# Altium PCB mdap.PcbDoc (part 1 of 2)
Units mil, origin at the board's own origin, x right, y up, seen from the top; angles counter-clockwise.
Board outline 1970 x 1970 mil, 4 copper layers (Top Layer, Internal Plane 1, Signal Layer 1, Bottom Layer), stack 45.004 mil thick; 153 components, 124 nets, 474 pads, 214 vias.
Unrouted connection lines stored in the file: 3.
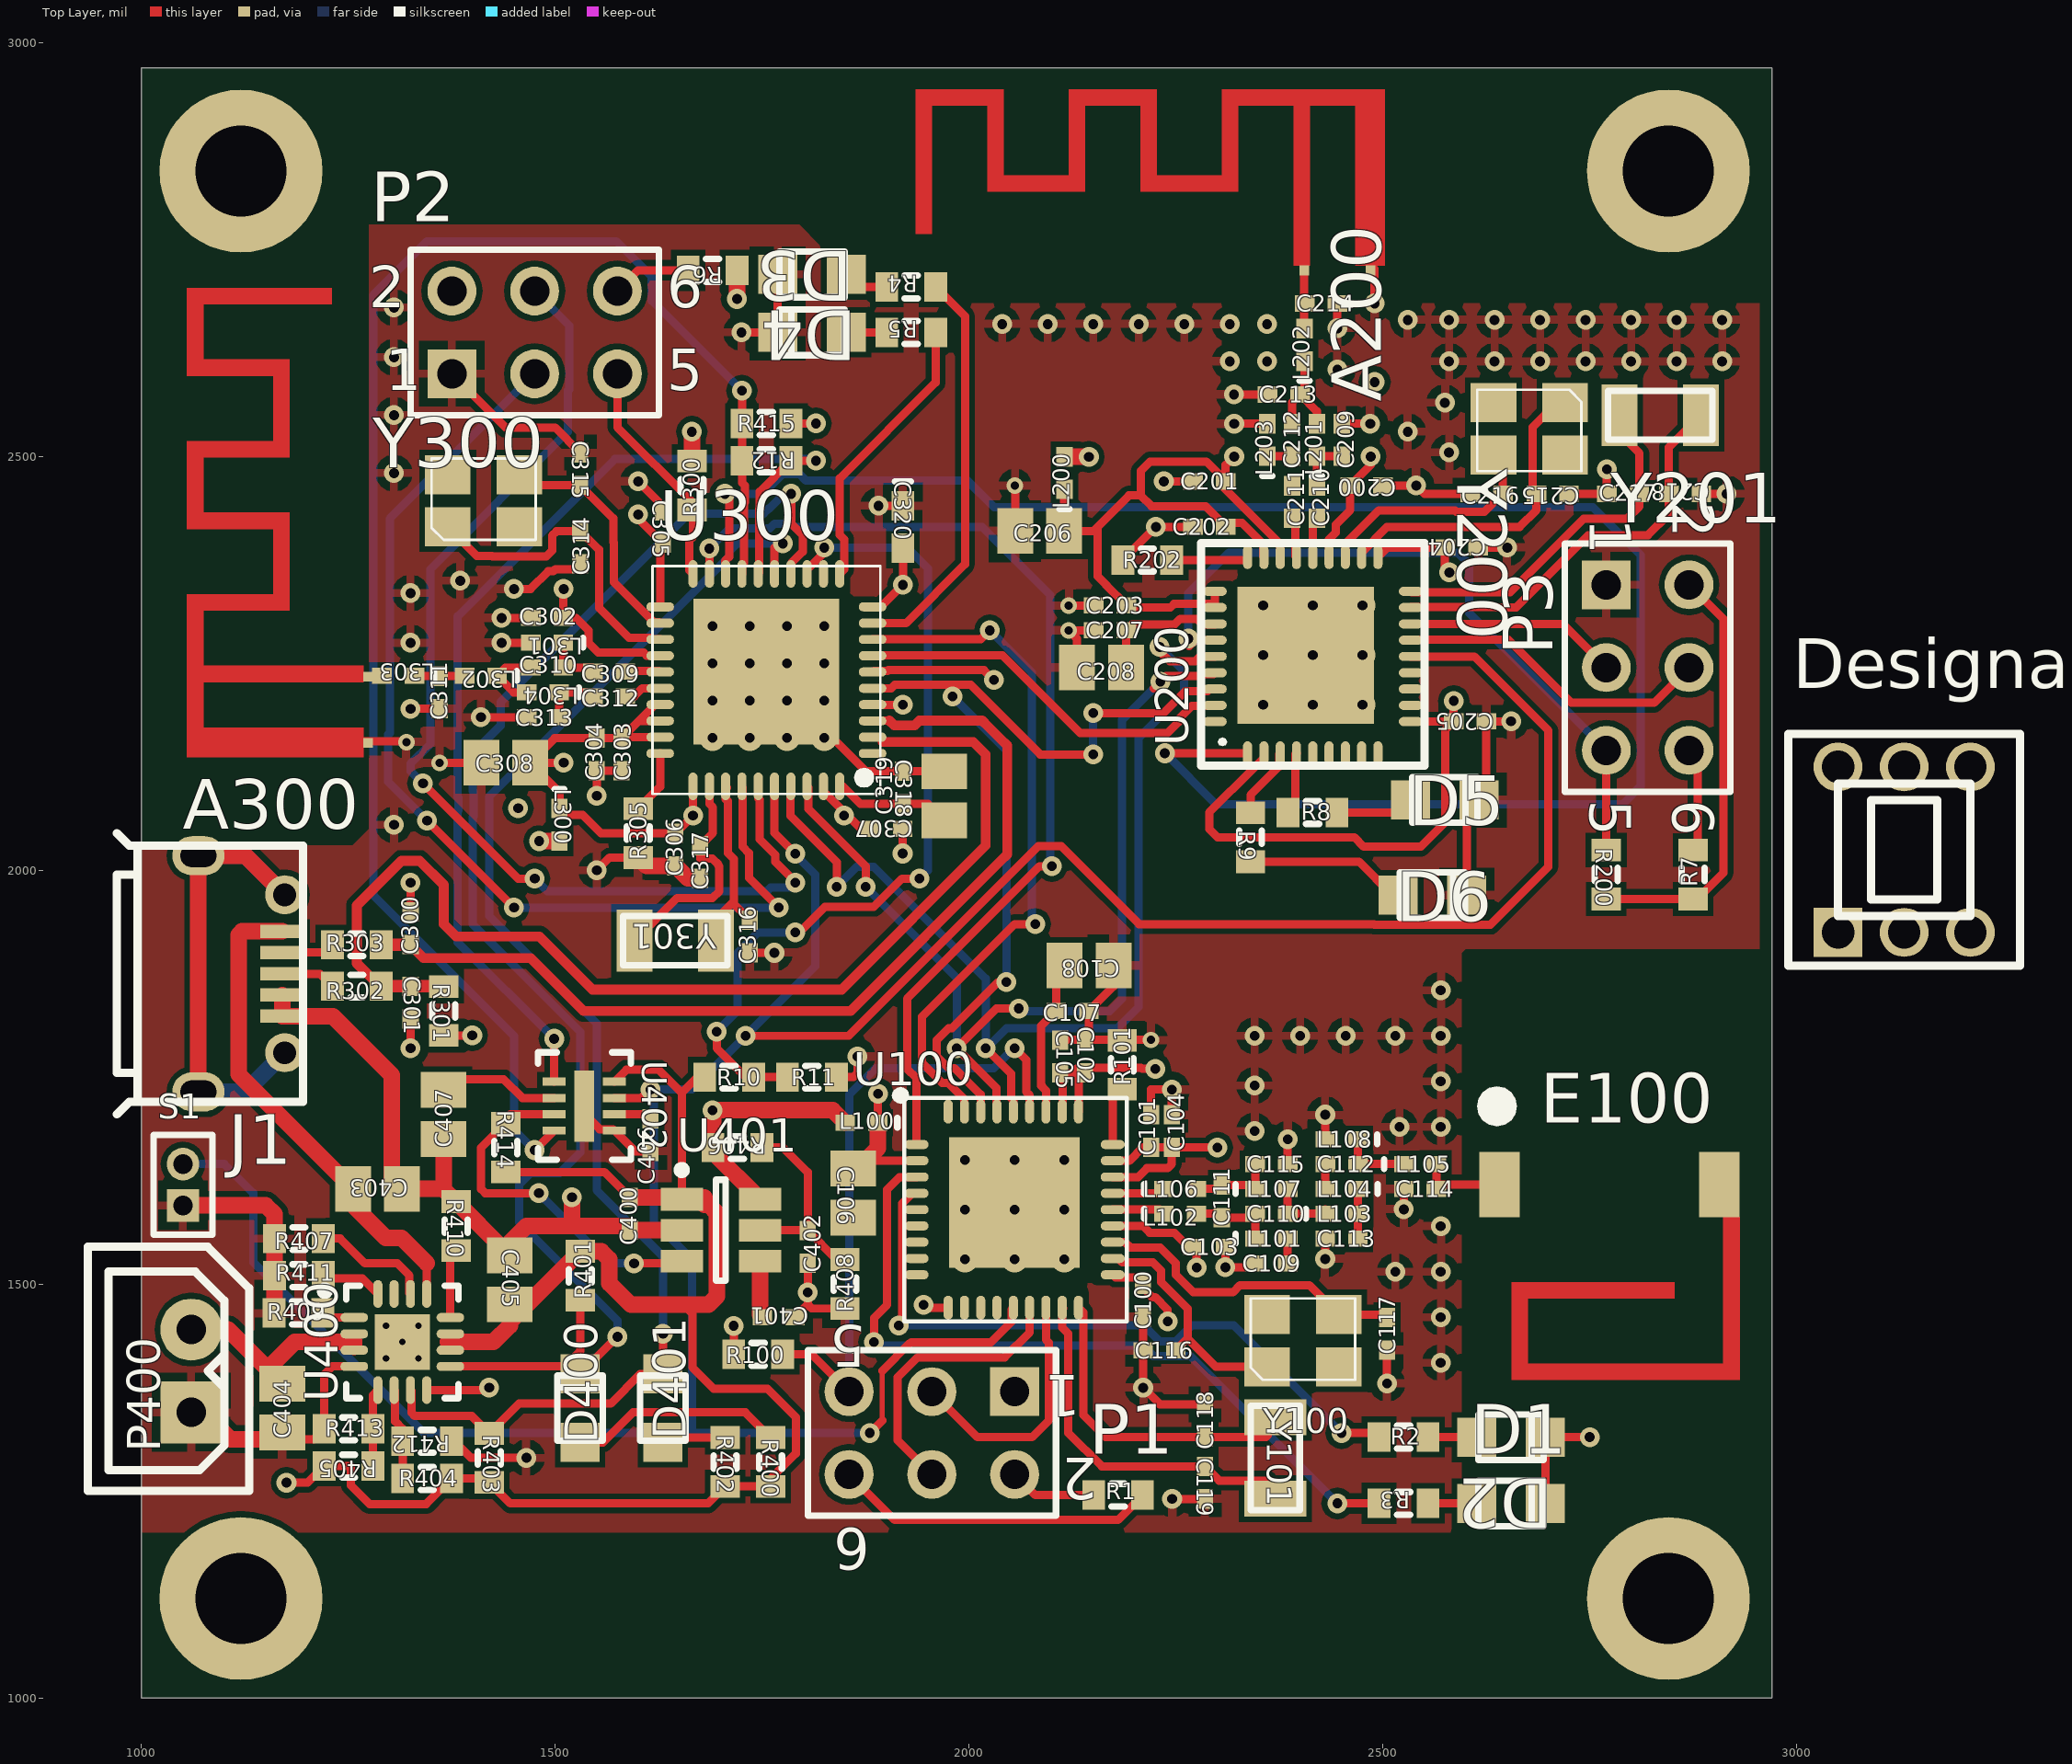
[diagram p0: Top Layer view]
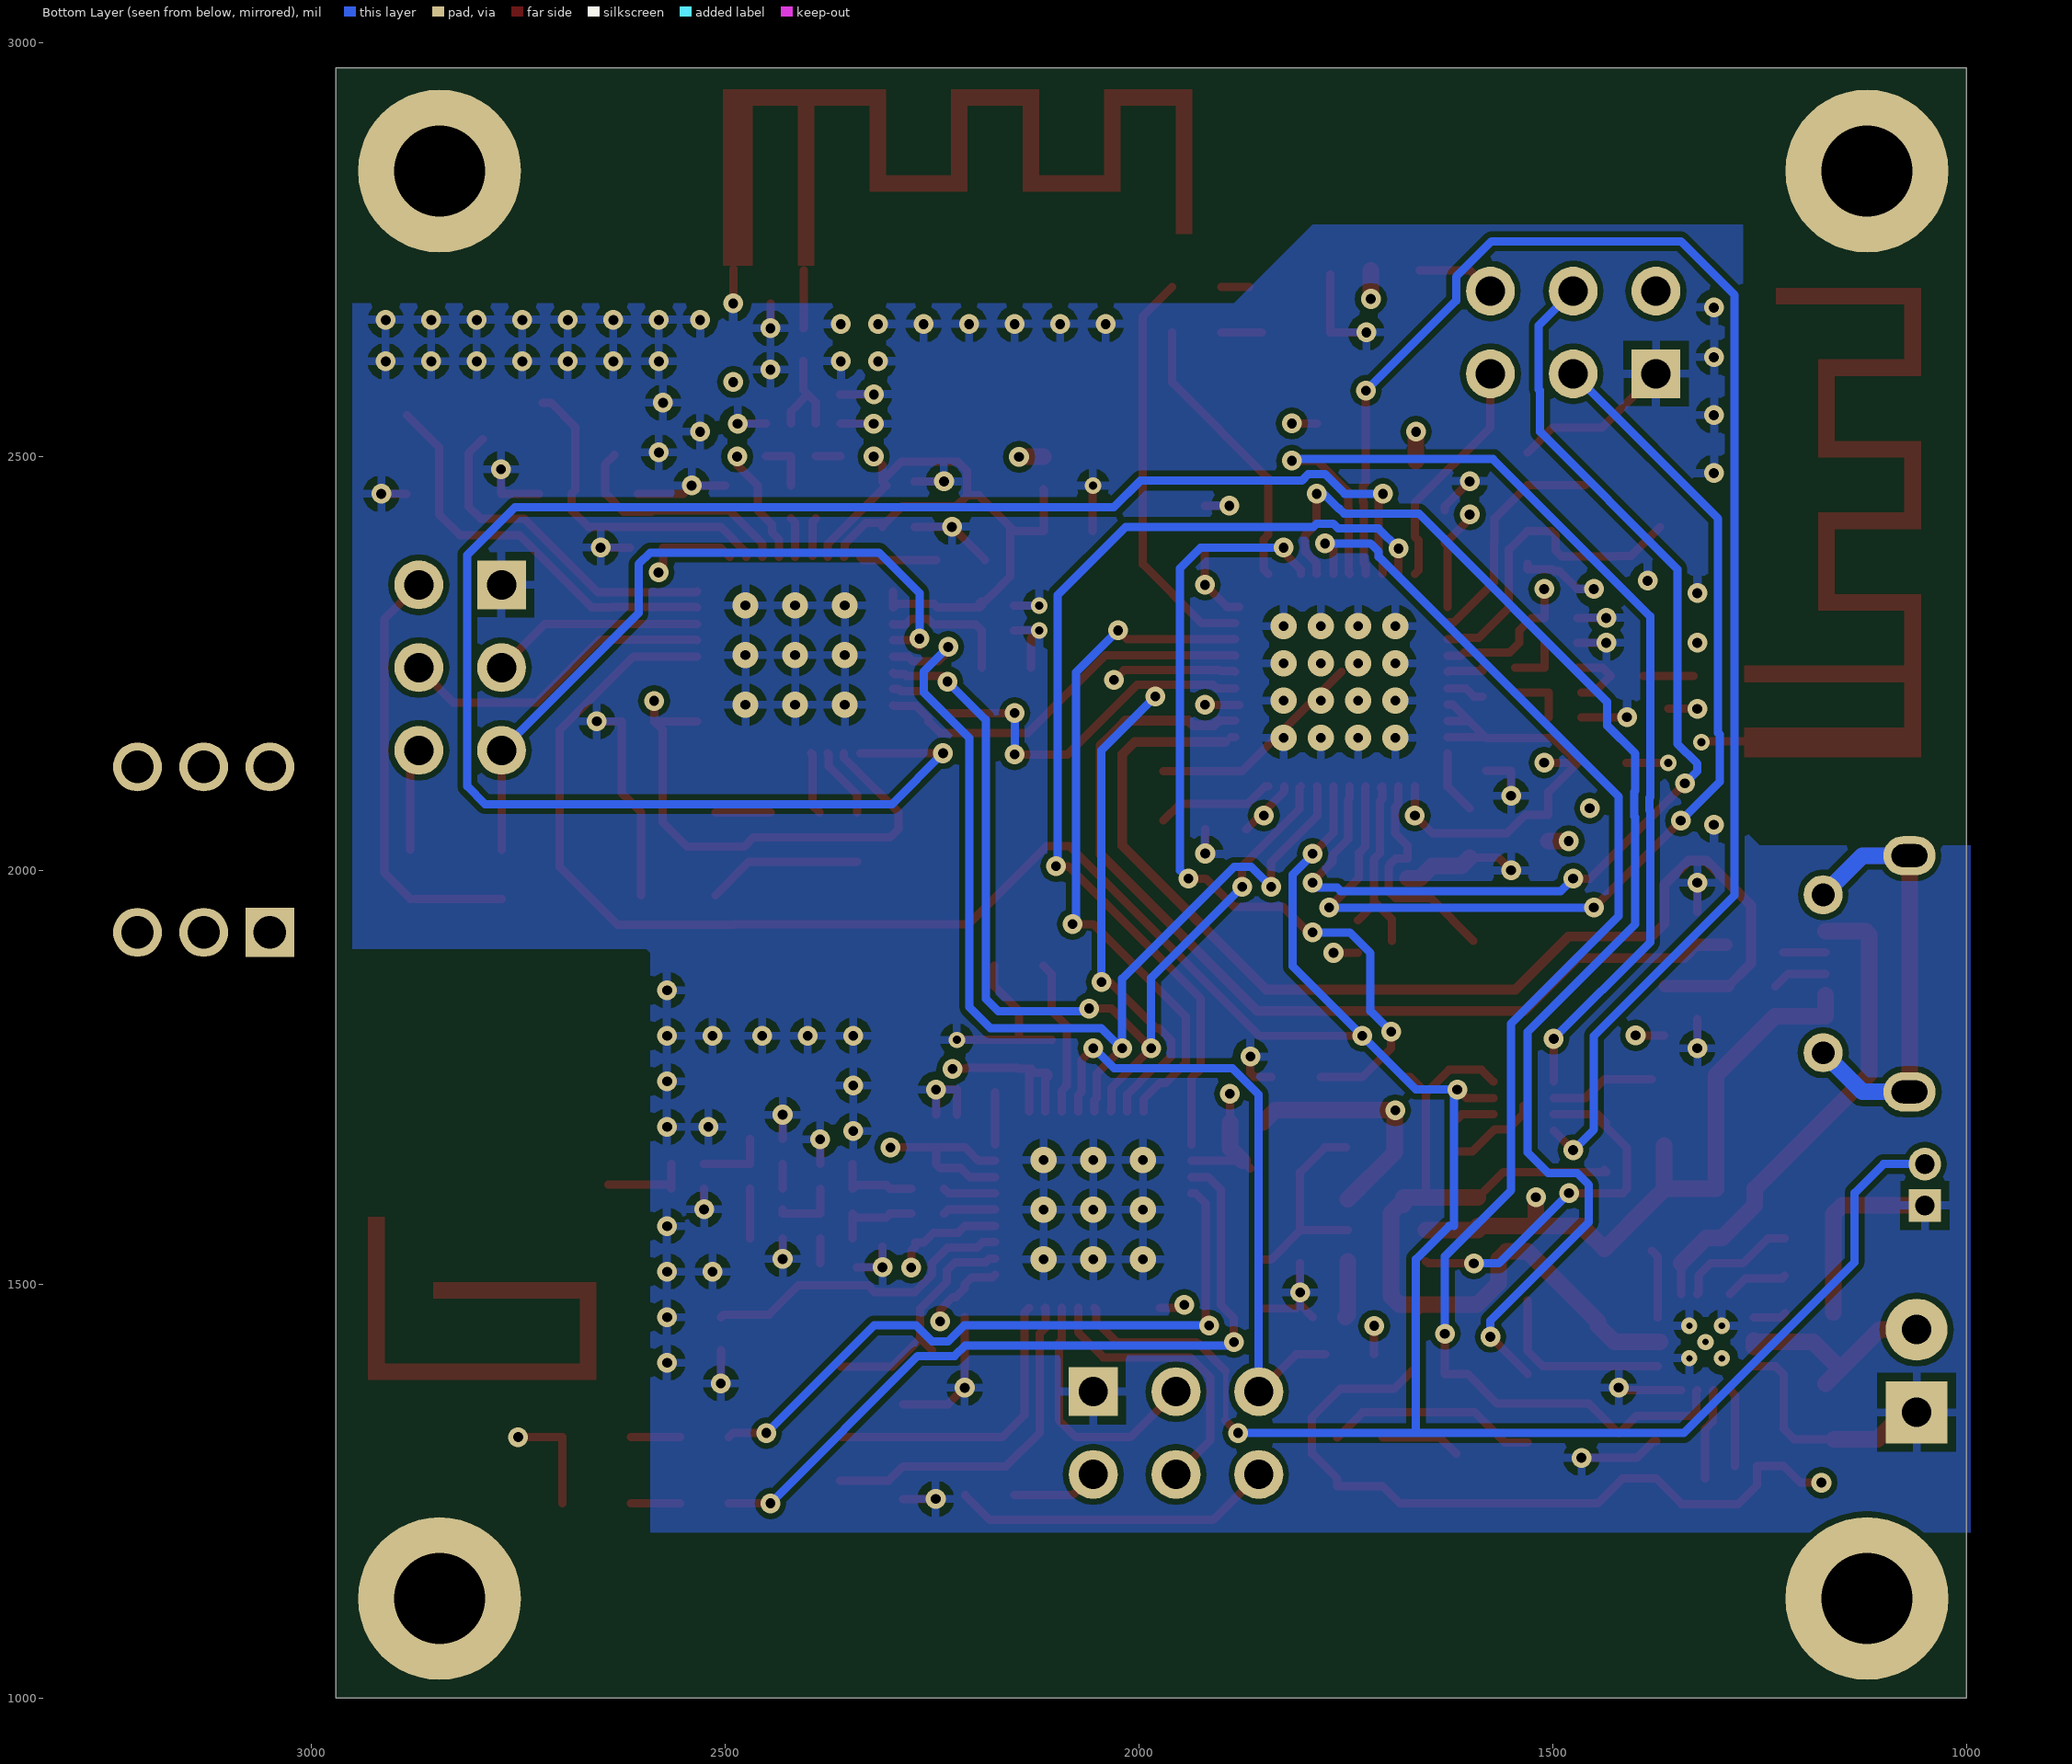
[diagram p1: Bottom Layer view, seen from below]
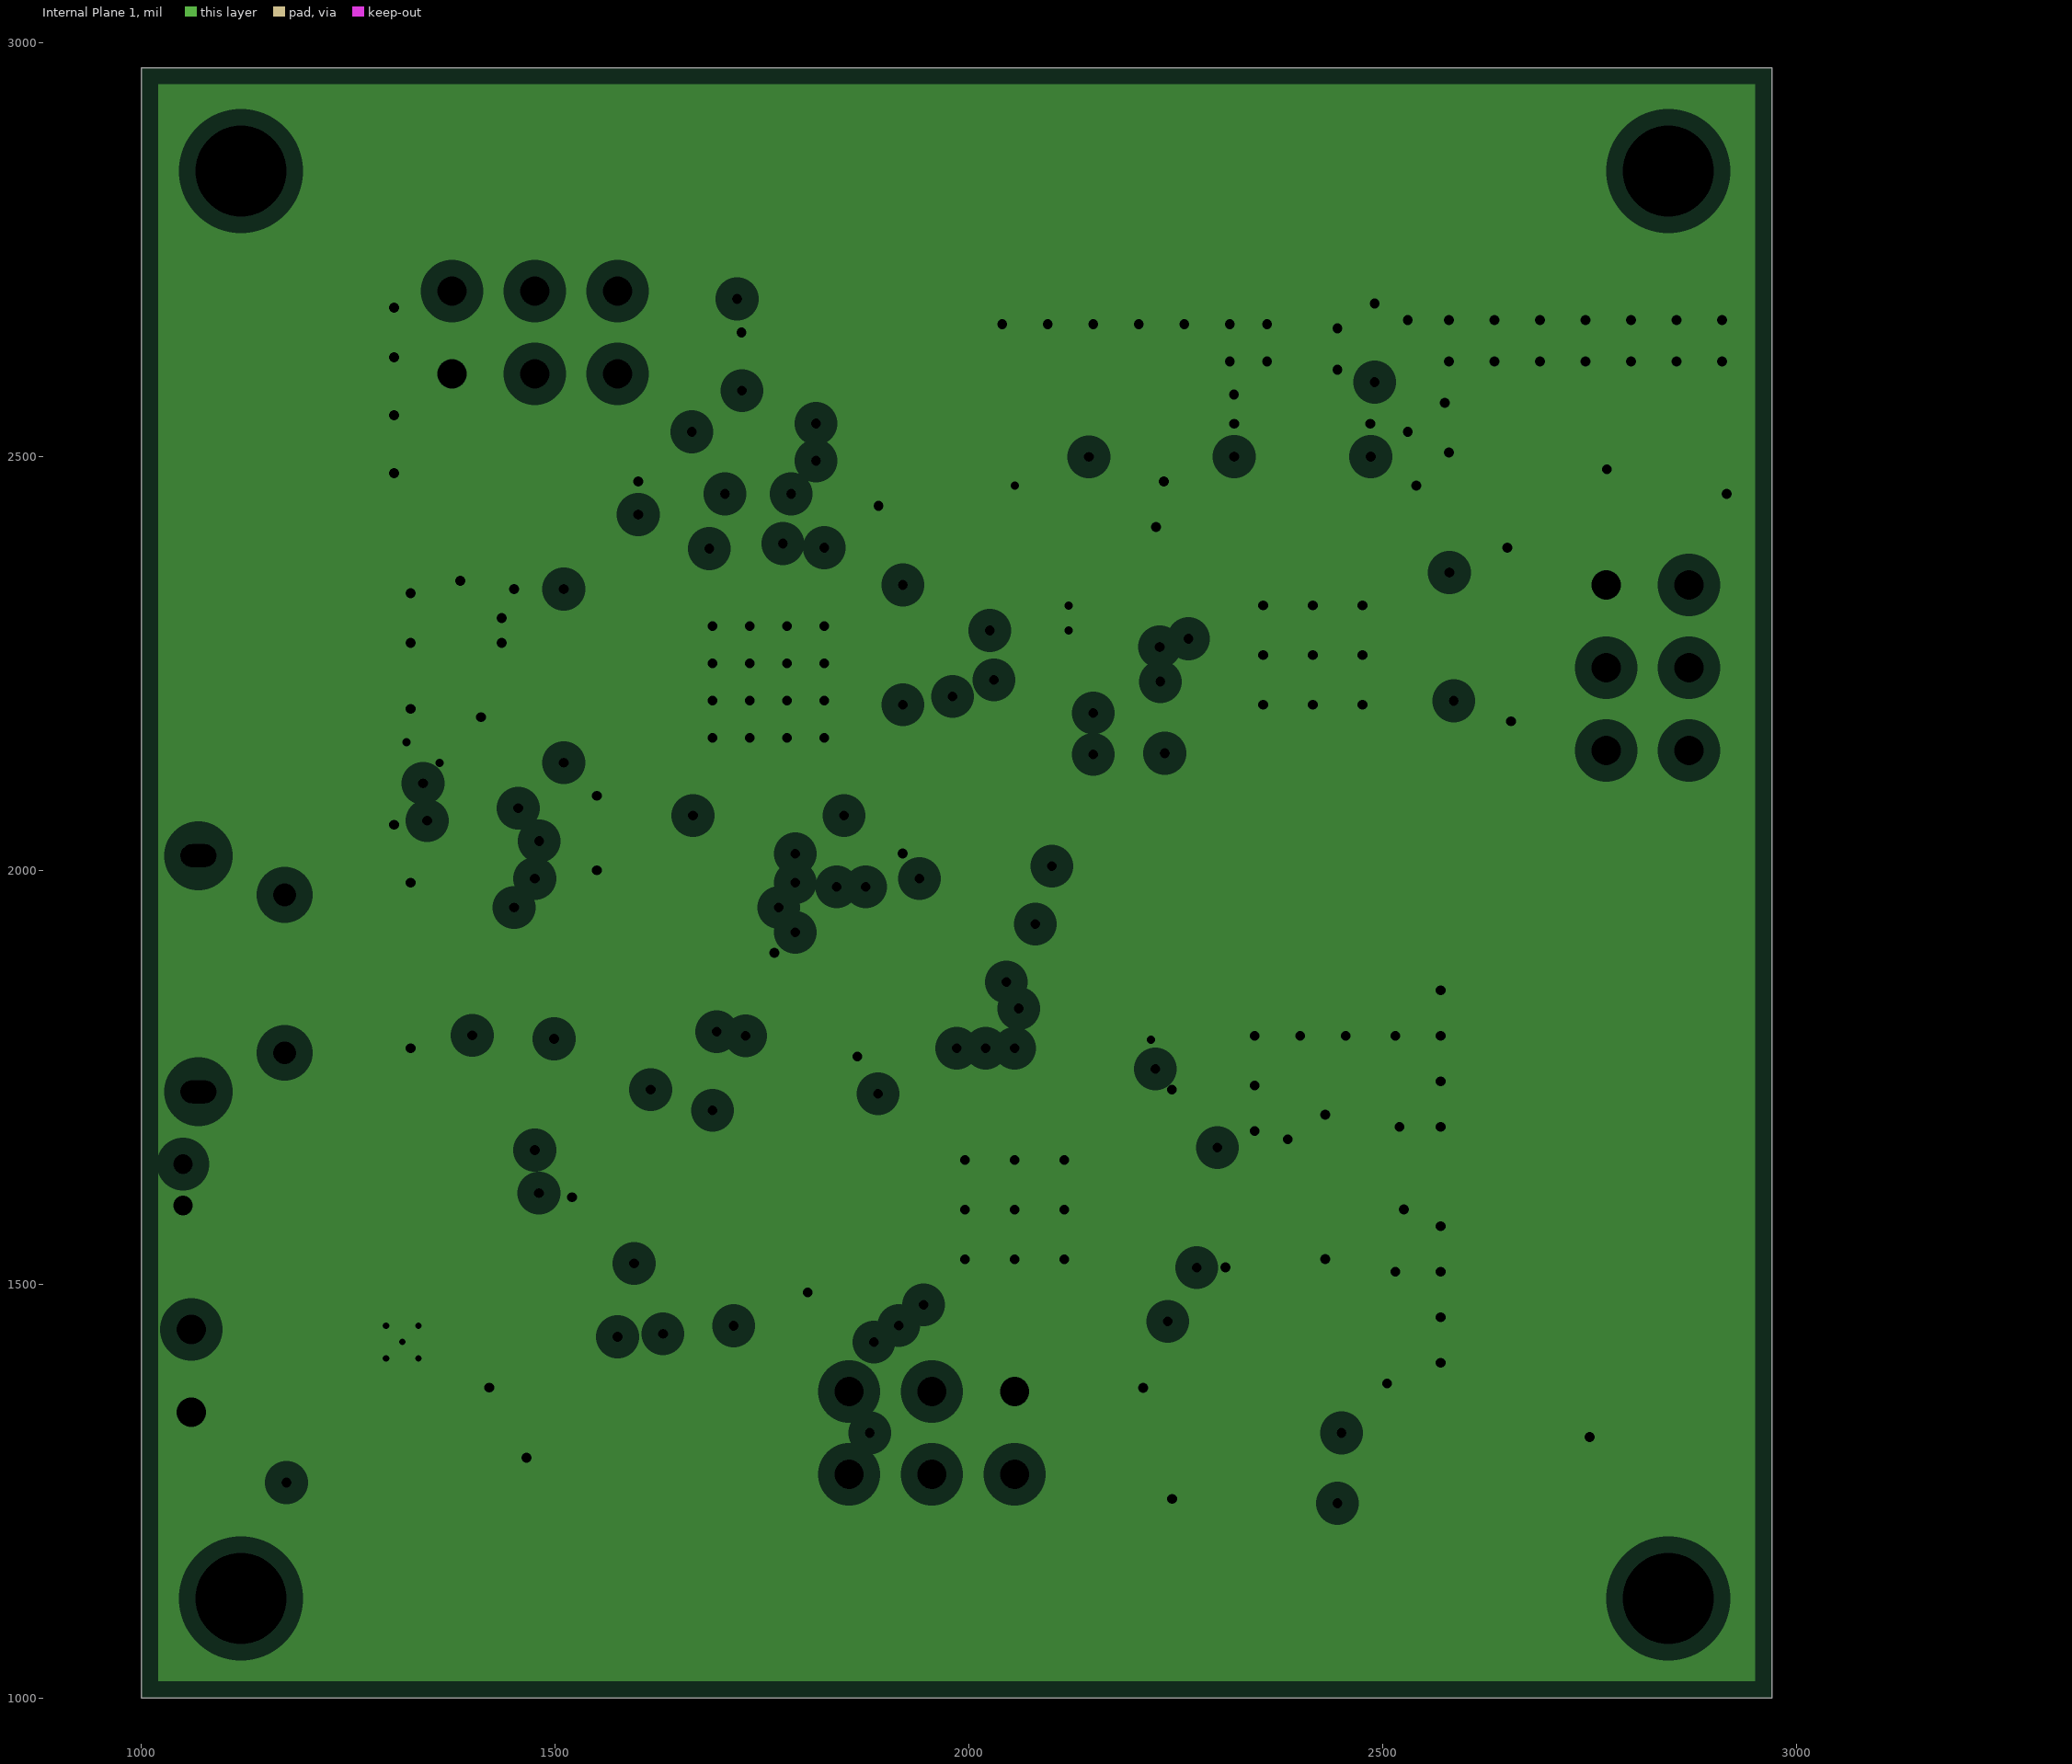
[diagram p2: Internal Plane 1, clearances drawn from the general rule]
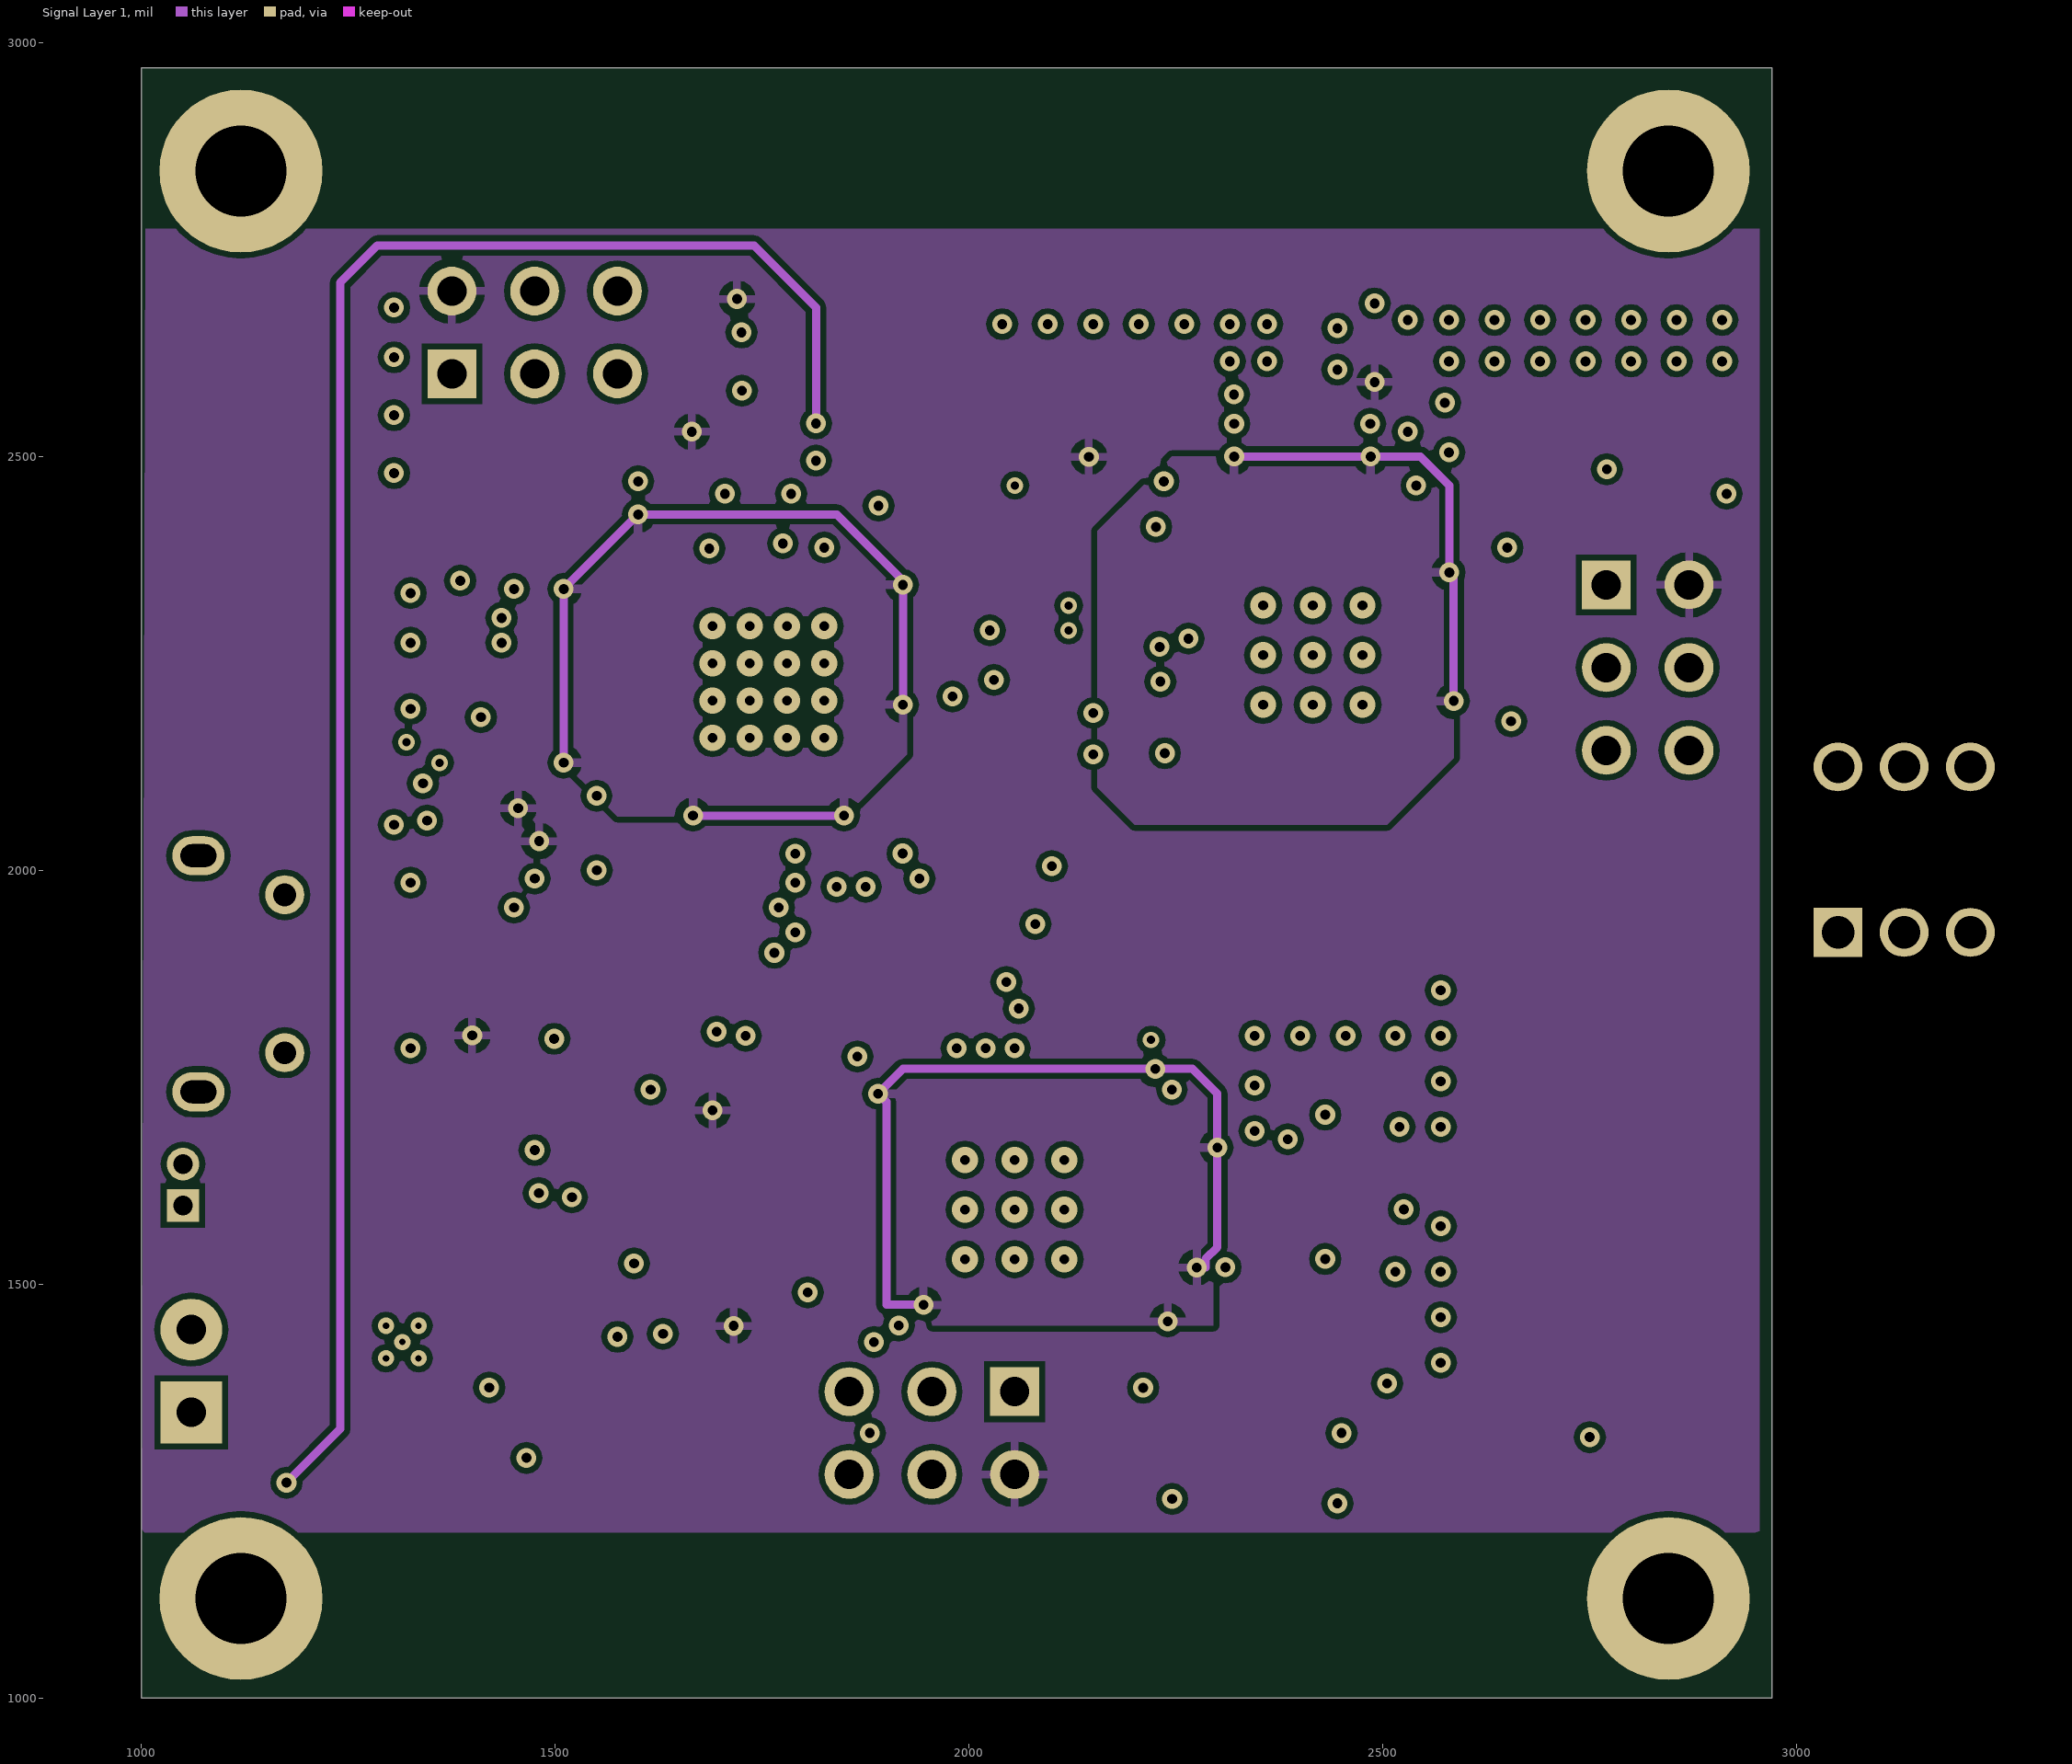
[diagram p3: Signal Layer 1]

## Layer stack, top to bottom
Top Solder: solder mask 0.4, Solder Resist, Dk 3.5
Top Layer: signal copper 1.4
Dielectric 1: core 7.874, FR-4, Dk 4.2
Internal Plane 1: plane copper 1.4169, net GND
Dielectric 3: prepreg 23.622, FR-4, Dk 4.2
Signal Layer 1: signal copper 1.4169
Dielectric 2: core 7.874, FR-4, Dk 4.2
Bottom Layer: signal copper 1.4
Bottom Solder: solder mask 0.4, Solder Resist, Dk 3.5

## Board outline
1000,1000 2970,1000 2970,2970 1000,2970

## Design rules (kind name [scope] priority, off if disabled: settings)
Clearance [OnCopper vs OnCopper] p1: gap=7 except(8: Via-Via Track-Track)
ComponentClearance [OnCopper vs OnCopper] p1 off: gap=6 collisioncheckmode=3 verticalgap=10 showdistances=FALSE
DiffPairsRouting [All] p1: maxlimit=14 minlimit=10 mostfreqgap=14 toplayer_minwidth=10 toplayer_maxwidth=12 toplayer_prefwidth=12 midlayer1_minwidth=10 midlayer1_maxwidth=2 midlayer1_prefwidth=12 bottomlayer_minwidth=10 bottomlayer_maxwidth=2 bottomlayer_prefwidth=12 maxuncoupledlength=500
HoleSize [All] p1: absolutevalues=TRUE maxlimit=100 minlimit=12 maxpercent=80.000 minpercent=20.000
PlaneClearance [All] p1: clearance=20
PlaneConnect [All] p1: planeconnectstyle=Relief reliefexpansion=20 reliefentries=4 reliefconductorwidth=10 reliefairgap=10
PolygonConnect [All] p1: connectstyle=Relief reliefconductorwidth=10 reliefentries=4 polygonreliefangle="90 Angle" airgapwidth=10
RoomDefinition U_CC2540 [InComponentClass('U_CC2540')] p1: confinementstyle=ConfineIn formatcopy=TRUE lockcomponents=FALSE outline 1045,1550 2275,1550 2275,2775 1045,2775
RoomDefinition U_cc2510 [InComponentClass('U_cc2510')] p2: confinementstyle=ConfineIn formatcopy=TRUE lockcomponents=FALSE outline 1925,1935 2925,1935 2925,2955 1925,2955
RoomDefinition U_cc1110 [InComponentClass('U_cc1110')] p3: confinementstyle=ConfineIn formatcopy=TRUE lockcomponents=FALSE outline 1685,1205 2970,1205 2970,2770 1685,2770
RoomDefinition U_Alim [InComponentClass('U_Alim')] p4: confinementstyle=ConfineIn formatcopy=TRUE lockcomponents=FALSE outline 920,1195 1885,1195 1885,2575 920,2575
RoomDefinition TOP [InComponentClass('TOP')] p5: confinementstyle=ConfineIn formatcopy=TRUE lockcomponents=FALSE outline 955,1135 2975,1135 2975,2970 955,2970
RoutingVias [All] p1: holewidth=15 width=30 viastyle="Through Hole" minholewidth=12 minwidth=24 maxholewidth=28 maxwidth=50
SMDNeckDown [All] p1: percent=75.000
SolderMaskExpansion [All] p1: expansion=4
UnpouredPolygon [All] p1: allowunpoured=FALSE
Width [All] p1: maxlimit=24 minlimit=6 preferedwidth=10
24 further rules are at their usual default settings.

## Classes and differential pairs
component class TOP: D1 D2 D3 D4 D5 D6 J1 P1 P2 P3 R1 R2 R3 R4 R5 R6 R7 R8 R9 R10 R11 R12 S1
component class U_Alim: C400 C401 C402 C403 C404 C405 C406 C407 D400 D401 P400 R400 R401 R402 R403 R404 R405 R406 R407 R408 R409 R410 R411 R412 R413 R414 R415 U400 U401 U402
component class U_cc1110: C100 C101 C102 C103 C104 C105 C106 C107 C108 C109 C110 C111 C112 C113 C114 C115 C116 C117 C118 C119 E100 L100 L101 L102 L103 L104 L105 L106 L107 L108 R100 R101 U100 Y100 Y101
component class U_cc2510: A200 C200 C201 C202 C203 C204 C205 C206 C207 C208 C209 C210 C211 C212 C213 C214 C215 C216 C217 C218 L200 L201 L202 L203 R200 R202 U200 Y200 Y201
component class U_CC2540: A300 C300 C301 C302 C303 C304 C305 C306 C307 C308 C309 C310 C311 C312 C313 C314 C315 C316 C317 C318 C319 C320 L300 L301 L302 L303 L304 R300 R301 R302 R303 R305 U300 Y300 Y301
differential pair D: +D_P -D_N

## Components (designator, comment, footprint, x,y, rotation, side; value= is the part's Value field where it differs from the comment)
A200 "Antenna_IIFA_1" ANTENNA_IIFA_1#1 2530,2645 r90 top
A300 "Antenna_IIFA_1" ANTENNA_IIFA_1#2 1353.8,2109.17 r0 top
C100 "Cap" 0402#1 2210,1480 r90 top
C101 "Cap" 0402#1 2220,1685 r270 top
C102 "Cap" 0402#1 2140,1775 r270 top
C103 "Cap" 0402#1 2290,1545 r180 top
C104 "Cap" 0402#1 2245,1685 r270 top
C105 "Cap" 0402#1 2110,1775 r270 top
C106 "Cap" C0805 1860,1610 r90 top
C107 "Cap" 0402#1 2125,1830 r0 top
C108 "Cap" C0805 2145,1885 r0 top
C109 "Cap" 0402#1 2365.31,1525 r0 top
C110 "Cap" 0402#1 2365.31,1585 r180 top
C111 "Cap" 0402#1 2305.31,1600 r270 top
C112 "Cap" 0402#1 2450.31,1645 r180 top
C113 "Cap" 0402#1 2450,1555 r0 top
C114 "Cap" 0402#1 2545,1615 r180 top
C115 "Cap" 0402#1 2365.31,1645 r180 top
C116 "Cap" 0402#1 2230,1420 r0 top
C117 "Cap" 0402#1 2505,1440 r90 top
C118 "Cap" 0402#1 2285,1335 r270 top
C119 "Cap" 0402#1 2285,1260 r90 top
C200 "Cap" 0402#1 2480.32,2465 r180 top
C201 "Cap" 0402#1 2290.32,2470 r0 top
C202 "Cap" 0402#1 2290.32,2415 r0 top
C203 "Cap" 0402#1 2170.32,2320 r0 top
C204 "Cap" 0402#1 2595.32,2390 r180 top
C205 "Cap" 0402#1 2605.32,2180 r180 top
C206 "Cap" C0805 2085.32,2410 r0 top
C207 "Cap" 0402#1 2170.32,2290 r180 top
C208 "Cap" C0805 2160,2245 r180 top
C209 "Cap" 0402#1 2450.32,2520 r270 top
C210 "Cap" 0402#1 2420.32,2445 r270 top
C211 "Cap" 0402#1 2390.32,2445 r270 top
C212 "Cap" 0402#1 2390.32,2520 r270 top
C213 "Cap" 0402#1 2380.32,2575 r0 top
C214 "Cap" 0402#1 2425.32,2685 r180 top
C215 "Cap" 0402#1 2705.32,2455 r180 top
C216 "Cap" 0402#1 2625.32,2455 r0 top
C217 "Cap" 0402#1 2790.32,2455 r0 top
C218 "Cap" 0402#1 2865.32,2455 r180 top
C300 "Cap" 0402#1 1325,1930 r90 top
C301 "Cap" 0402#1 1325,1840 r270 top
C302 "Cap" 0402#1 1490,2305 r0 top
C303 "Cap" 0402#1 1580,2140 r90 top
C304 "Cap" 0402#1 1550,2140 r90 top
C305 "Cap" 0402#1 1630,2415 r270 top
C306 "Cap" 0402#1 1645,2025 r90 top
C307 "Cap" 0402#1 1900,2050 r180 top
C308 "Cap" C0805 1440,2130 r0 top
C309 "Cap" 0402#1 1565,2240 r0 top
C310 "Cap" 0402#1 1490,2245 r0 top
C311 "Cap" 0402#1 1360,2215 r90 top
C312 "Cap" 0402#1 1565,2210 r0 top
C313 "Cap" 0402#1 1485,2185 r0 top
C314 "Cap" 0402#1 1530,2390 r90 top
C315 "Cap" 0402#1 1530,2485 r270 top
C316 "Cap" 0402#1 1735,1920 r90 top
C317 "Cap" 0402#1 1675,2010 r90 top
C318 "Cap" 0402#1 1920,2100 r270 top
C319 "Cap" C0805 1970,2090 r270 top
C320 "Cap" 0402#2 1920,2415 r270 top
C400 "Cap" 0402#1 1590,1585 r90 top
C401 "Cap" 0402#1 1770,1460 r180 top
C402 "Cap" 0402#1 1805,1545 r90 top
C403 "Cap" C0805 1285,1615 r180 top
C404 "Cap" C0805 1170,1350 r90 top
C405 "Cap" C0805 1445,1505 r270 top
C406 "Cap" 0402#1 1615,1680 r90 top
C407 "Cap" C0805 1365,1705 r90 top
D1 "ROJO" LED_0805 2655,1315 r0 top
D2 "VERDE" LED_0805 2655,1235 r0 top
D3 "ROJO" LED_0805 1810,2720 r180 top
D4 "VERDE" LED_0805 1810,2650 r180 top
D5 "ROJO" LED_0805 2575,2085 r0 top
D6 "VERDE" LED_0805 2560,1970 r0 top
D400 "ROJO" LED_0805 1530,1350 r90 top
D401 "VERDE" LED_0805 1630,1350 r90 top
Designator1 "Comment" SW_7x7 3050,1925 r0 top
E100 "Antenna Chip" JOHANSON_0868AT43A0020 2700.31,1690 r0 top
J1 "440247-1" USB_C10418 1170,1875 r90 top
L100 "Inductor" 0402-A 1870,1695 r180 top
L101 "Inductor" 0402-A 2365.31,1555 r0 top
L102 "Inductor" 0402-A 2255,1585 r0 top
L103 "Inductor" 0402-A 2450.31,1585 r0 top
L104 "Inductor" 0402-A 2450.31,1615 r180 top
L105 "Inductor" 0402-A 2545,1645 r0 top
L106 "Inductor" 0402-A 2255,1615 r0 top
L107 "Inductor" 0402-A 2365.31,1615 r0 top
L108 "Inductor" 0402-A 2450,1675 r180 top
L200 "Inductor" 0402-A 2115.32,2480 r90 top
L201 "Inductor" 0402-A 2420.32,2520 r90 top
L202 "Inductor" 0402-A 2405.32,2635 r90 top
L203 "Inductor" 0402-A 2360.32,2520 r90 top
L300 "Inductor" 0402-A 1505,2055 r270 top
L301 "Inductor" 0402-A 1490,2275 r180 top
L302 "Inductor" 0402-A 1410,2235 r180 top
L303 "Inductor" 0402-A 1310,2235 r180 top
L304 "Inductor" 0402-A 1485,2215 r180 top
P1 "Header 3X2" HDR2X3 2055,1370 r180 top
P2 "Header 3X2" HDR2X3 1375,2600 r0 top
P3 "Header 3X2" HDR2X3 2770,2345 r270 top
P400 "Battery" MOLEX_5267-2 1060,1345 r90 top
R1 "Res3" J1-0603 2180,1245 r0 top
R2 "Res3" J1-0603 2525,1315 r0 top
R3 "Res3" J1-0603 2525,1235 r0 top
R4 "Res3" J1-0603 1930,2705 r180 top
R5 "Res3" J1-0603 1930,2650 r180 top
R6 "Res3" J1-0603 1690,2725 r180 top
R7 "Res3" J1-0603 2875,1995 r90 top
R8 "Res3" J1-0603 2415,2070 r0 top
R9 "Res3" J1-0603 2340,2040 r270 top
R10 "Res3" J1-0603 1710,1750 r180 top
R11 "Res3" J1-0603 1810,1750 r180 top
R12 "Res3" J1-0603 1755,2495 r180 top
R100 "Res3" J1-0603 1745,1415 r180 top
R101 "Res3" J1-0603 2185,1765 r270 top
R200 "Res3" J1-0603 2770,1995 r270 top
R202 "Res3" J1-0603 2215.32,2375 r0 top
R300 "Res3" J1-0603 1665,2465 r90 top
R301 "Res3" J1-0603 1365,1830 r270 top
R302 "Res3" J1-0603 1260,1860 r0 top
R303 "Res3" J1-0603 1260,1910 r0 top
R305 "Res3" J1-0603 1600,2045 r90 top
R400 "Res3" J1-0603 1760,1285 r270 top
R401 "Res3" J1-0603 1530,1510 r90 top
R402 "Res3" J1-0603 1705,1285 r270 top
R403 "Res3" J1-0603 1420,1290 r270 top
R404 "Res3" J1-0603 1345,1265 r0 top
R405 "Res3" J1-0603 1250,1280 r180 top
R406 "Res3" J1-0603 1720,1665 r180 top
R407 "Res3" J1-0603 1190,1555 r0 top
R408 "Res3" J1-0603 1850,1500 r90 top
R409 "Res3" J1-0603 1189.53,1465 r0 top
R410 "Res3" J1-0603 1380,1570 r270 top
R411 "Res3" J1-0603 1190,1510 r0 top
R412 "Res3" J1-0603 1345,1310 r180 top
R413 "Res3" J1-0603 1250,1325 r0 top
R414 "Res3" J1-0603 1440,1665 r270 top
R415 "Res3" J1-0603 1755,2540 r0 top
S1 "SW-PB" mhdr1x2 1050,1595 r90 top
U100 "CC1110" "QLP36_4_4 (Reflow)" 2055,1590 r0 top
U200 "CC2510" "QLP36_4_4 norteam silk (Reflow)" 2415.32,2260 r90 top
U300 "CC2540" "QFN40_RHA (DATASHEET)" 1755,2230 r180 top
U400 "BQ24232RGTR" RGT16-1700X1700TP 1315,1430 r0 top
U401 "TPS79301" SOT26A-6M 1700,1565 r0 top
U402 "LTC2950CDDB-1" DDB8 1535,1715 r180 top
Y100 "26MHz" XTAL_3225 2360,1400 r0 top
Y101 "32K768" XTAL_3215 2370,1290 r270 top
Y200 "26MHz" XTAL_3225 2720.32,2565 r180 top
Y201 "32K768" XTAL_3215 2835.32,2550 r0 top
Y300 "32MHz" XTAL_3225 1370,2415 r0 top
Y301 "32K768" XTAL_3215 1645,1915 r180 top

## Footprints (in the part's own frame and the unit in brackets; to place one, negate y for a bottom-side part, rotate by r counter-clockwise, add the part's x,y. Pads: shape width x height; smd on the part's side, far side on the other; paste and mask are expansions set on the pad)
0402#1 [mm] "Chip Capacitor, Body 1.0x0.5mm, IPC High Density"
  rect 0.6x0.5 smd: 1(-0.5,0) 2(0.5,0)
  body extent -0.55,-0.3 0.55,0.3, height 1.3
0402#2 [mm] "Chip Capacitor; Body 1.0 x 0.5 mm (LxW typ)"
  rect 0.9x0.7 smd: 1(-0.65,0) 2(0.65,0)
  silkscreen extent -1.4,-0.25 -1.4,0.25
0402-A [mm] "Chip Inductor, Body 1.0x0.5mm, IPC High Density"
  rect 0.6x0.5 smd: 1(-0.5,0) 2(0.5,0)
  silkscreen extent -1.1,-0.15 -1.1,0.15, body extent -0.55,-0.3 0.55,0.3, height 0.55
ANTENNA_IIFA_1#1 [mm]
  rect 0.3x0.3 smd paste-0.3 mask-0.3: 1(2.032,3.175) 2(2.032,1.143)
  Top Layer region: 7.589,0.703 7.089,0.703 7.089,5.703 7.589,5.703
  Top Layer region: 7.589,3.003 2.18,3.003 2.18,3.503 7.589,3.503
  Top Layer region: 7.589,15.103 3.149,15.103 3.149,14.603 7.589,14.603
  Top Layer region: 7.589,0.703 2.18,0.703 2.18,1.603 7.589,1.603
  Top Layer region: 4.449,8.203 7.589,8.203 7.589,7.703 4.449,7.703
  Top Layer region: 7.589,12.403 7.089,12.403 7.089,15.103 7.589,15.103
  Top Layer region: 4.449,12.903 7.589,12.903 7.589,12.403 4.449,12.403
  Top Layer region: 4.949,9.903 4.449,9.903 4.449,12.903 4.949,12.903
  Top Layer region: 4.449,5.203 7.589,5.203 7.589,5.703 4.449,5.703
  Top Layer region: 4.949,5.203 4.449,5.203 4.449,8.203 4.949,8.203
  Top Layer region: 7.589,7.703 7.089,7.703 7.089,10.403 7.589,10.403
  Top Layer region: 7.589,10.403 4.449,10.403 4.449,9.903 7.589,9.903
ANTENNA_IIFA_1#2 [mm]
  rect 0.3x0.3 smd paste-0.3 mask-0.3: 1(-2.032,3.175) 2(-2.032,1.143)
  Top Layer region: -7.589,10.403 -4.449,10.403 -4.449,9.903 -7.589,9.903
  Top Layer region: -7.589,7.703 -7.089,7.703 -7.089,10.403 -7.589,10.403
  Top Layer region: -4.949,5.203 -4.449,5.203 -4.449,8.203 -4.949,8.203
  Top Layer region: -4.449,5.203 -7.589,5.203 -7.589,5.703 -4.449,5.703
  Top Layer region: -4.949,9.903 -4.449,9.903 -4.449,12.903 -4.949,12.903
  Top Layer region: -4.449,12.903 -7.589,12.903 -7.589,12.403 -4.449,12.403
  Top Layer region: -7.589,12.403 -7.089,12.403 -7.089,15.103 -7.589,15.103
  Top Layer region: -4.449,8.203 -7.589,8.203 -7.589,7.703 -4.449,7.703
  Top Layer region: -7.589,0.703 -2.18,0.703 -2.18,1.603 -7.589,1.603
  Top Layer region: -7.589,15.103 -3.149,15.103 -3.149,14.603 -7.589,14.603
  Top Layer region: -7.589,3.003 -2.18,3.003 -2.18,3.503 -7.589,3.503
  Top Layer region: -7.589,0.703 -7.089,0.703 -7.089,5.703 -7.589,5.703
C0805 [mm] "Chip Capacitor, Body 2.0x1.3mm, IPC High Density"
  rect 1.1x1.4 smd: 1(-0.75,0) 2(0.75,0)
  body extent -1.1,-0.72 1.1,0.72, height 1.4
DDB8 [mm] "SON, 8-Leads, Body 3x2 mm, Pitch 0.5mm, Linear Recommended"
  rect 0.7x0.25 smd: 1(-0.925,0.75) 2(-0.925,0.25) 3(-0.925,-0.25) 4(-0.925,-0.75) 5(0.925,-0.75) 6(0.925,-0.25) 7(0.925,0.25) 8(0.925,0.75)
  rect 0.61x2.2 smd: 9(0,0)
  silkscreen extent -1.88,-1.65 1.43,1.65, body extent -1,-1.5 1,1.5, height 0.8
HDR2X3 [mm] "Connector; Header; 3x2 Position"
  rect 1.5x1.5 hole 0.9: 1(0,0)
  round 1.5 hole 0.9: 2(0,2.54) 3(2.54,0) 4(2.54,2.54) 5(5.08,0) 6(5.08,2.54)
  silkscreen extent -1.27,-1.27 6.35,3.81
J1-0603 [mm] "Chip Resistor, Body 1.6x0.8mm, IPC High Density"
  rect 0.7x0.9 smd: 1(-0.75,0) 2(0.75,0)
  silkscreen extent -0.2,-0.35 0.2,0.35, body extent -0.85,-0.48 0.85,0.48, height 0.9
JOHANSON_0868AT43A0020 [mm]
  rect 1.25x2 smd paste+0 mask+0.1: 1(-1.51,-1.77) 2(5.24,-1.77)
  Top Layer region: -0.635,-7.27 5.365,-7.27 5.365,-7.77 -0.635,-7.77
  Top Layer region: 5.365,-2.77 5.865,-2.77 5.865,-7.77 5.365,-7.77
  Top Layer region: -1.135,-4.77 -0.635,-4.77 -0.635,-7.77 -1.135,-7.77
  Top Layer region: -0.635,-4.77 3.865,-4.77 3.865,-5.27 -0.635,-5.27
  silkscreen extent -2.2,0.02 -0.97,1.24, body extent -1.69,-2.77 5.35,-0.76, height 1.2
LED_0805 [mm] "LED 0805"
  rect 1.2x1.2 smd: 1(-1.05,0) 2(1.05,0)
  silkscreen extent -1,-0.7 1,0.7, body extent -1.02,-0.64 1.02,0.64, height 1.1
mhdr1x2 [mm] "Connector; Header; 2 Position"
  rect 1x1 hole 0.6: 1(0,0)
  round 1 hole 0.6: 2(1.27,0)
  silkscreen extent -0.9,-0.9 2.17,0.9
MOLEX_5267-2 [mm] "Conector Molex serie 5267 2 pin, paso 2.54mm"
  rect 1.9x1.9 hole 0.9: 1(0,0)
  round 1.9 hole 0.9: 2(2.54,0)
  silkscreen extent -2.41,-1.78 5.08,3.18, body extent -2.41,-1.78 5.08,3.18, height 5.9
"QFN40_RHA (DATASHEET)" [mm]
  oval 0.85x0.28 smd paste+0 mask+0.14: 1(-3.26,2.255) 2(-3.26,1.755) 3(-3.26,1.255) 4(-3.26,0.755) 5(-3.26,0.255) 6(-3.26,-0.245) 7(-3.26,-0.745) 8(-3.26,-1.245) 9(-3.26,-1.745) 10(-3.26,-2.245) 21(3.26,-2.245) 22(3.26,-1.745) 23(3.26,-1.245) 24(3.26,-0.745) 25(3.26,-0.245) 26(3.26,0.255) 27(3.26,0.755) 28(3.26,1.255) 29(3.26,1.755) 30(3.26,2.255)
  oval 0.28x0.85 smd paste+0 mask+0.14: 11(-2.25,-3.255) 12(-1.75,-3.255) 13(-1.25,-3.255) 14(-0.75,-3.255) 15(-0.25,-3.255) 16(0.25,-3.255) 17(0.75,-3.255) 18(1.25,-3.255) 19(1.75,-3.255) 20(2.25,-3.255) 31(2.25,3.265) 32(1.75,3.265) 33(1.25,3.265) 34(0.75,3.265) 35(0.25,3.265) 36(-0.25,3.265) 37(-0.75,3.265) 38(-1.25,3.265) 39(-1.75,3.265) 40(-2.25,3.265)
  rect 4.472x4.472 smd paste+0 mask+0.14: 41(0,-0.254)
  silkscreen extent -3.5,-3.5 3.5,3.5, body extent -3.05,-3.05 3.05,3.05, height 0.97
"QLP36_4_4 (Reflow)" [mil]
  oval 29x11 smd paste-2 mask+4: 1(-118.5,78.74) 2(-118.5,59.06) 3(-118.5,39.37) 4(-118.5,19.68) 5(-118.5,0) 6(-118.5,-19.68) 7(-118.5,-39.37) 8(-118.5,-59.06) 9(-118.5,-78.74) 19(118.5,-78.74) 20(118.5,-59.06) 21(118.5,-39.37) 22(118.5,-19.68) 23(118.5,0) 24(118.5,19.68) 25(118.5,39.37) 26(118.5,59.06) 27(118.5,78.74)
  oval 11x29 smd paste-2 mask+4: 10(-80.32,-118.5) 11(-60.63,-118.5) 12(-40.94,-118.5) 13(-21.26,-118.5) 14(-1.57,-118.5) 15(18.11,-118.5) 16(37.8,-118.5) 17(57.48,-118.5) 18(77.17,-118.5) 28(77.17,118.5) 29(57.48,118.5) 30(37.8,118.5) 31(18.11,118.5) 32(-1.57,118.5) 33(-21.26,118.5) 34(-40.94,118.5) 35(-60.63,118.5) 36(-80.32,118.5)
  rect 157.48x157.48 smd paste-2 mask+4: 37(-0.32,8.5)
  silkscreen extent -148,-135 135,148, body extent -120,-120 120,120, height 38
"QLP36_4_4 norteam silk (Reflow)" [mil]
  oval 29x11 smd paste+0.1 mask+4: 1(-118.5,78.74) 2(-118.5,59.06) 3(-118.5,39.37) 4(-118.5,19.68) 5(-118.5,0) 6(-118.5,-19.68) 7(-118.5,-39.37) 8(-118.5,-59.06) 9(-118.5,-78.74) 19(118.5,-78.74) 20(118.5,-59.06) 21(118.5,-39.37) 22(118.5,-19.68) 23(118.5,0) 24(118.5,19.68) 25(118.5,39.37) 26(118.5,59.06) 27(118.5,78.74)
  oval 11x29 smd paste+0.1 mask+4: 10(-80.32,-118.5) 11(-60.63,-118.5) 12(-40.94,-118.5) 13(-21.26,-118.5) 14(-1.57,-118.5) 15(18.11,-118.5) 16(37.8,-118.5) 17(57.48,-118.5) 18(77.17,-118.5) 28(77.17,118.5) 29(57.48,118.5) 30(37.8,118.5) 31(18.11,118.5) 32(-1.57,118.5) 33(-21.26,118.5) 34(-40.94,118.5) 35(-60.63,118.5) 36(-80.32,118.5)
  rect 165.35x165.35 smd paste+0 mask+0: 37(-0.32,8.5)
  silkscreen extent -133,-135 135,135, body extent -120,-120 120,120, height 38
RGT16-1700X1700TP [mm] "QFN, 16-Leads, Body 3x3mm, Pitch 0.5mm, Thermal Pad 1.7x1.7mm, TI Recommended"
  oval 0.85x0.28 smd paste-0.025 mask+0.07: 1(-1.475,0.75) 2(-1.475,0.25) 3(-1.475,-0.25) 4(-1.475,-0.75) 9(1.475,-0.75) 10(1.475,-0.25) 11(1.475,0.25) 12(1.475,0.75)
  oval 0.28x0.85 smd paste-0.025 mask+0.07: 5(-0.75,-1.475) 6(-0.25,-1.475) 7(0.25,-1.475) 8(0.75,-1.475) 13(0.75,1.475) 14(0.25,1.475) 15(-0.25,1.475) 16(-0.75,1.475)
  rect 1.7x1.7 smd paste-0.85 mask+0.07: 17(0,0)
  silkscreen extent -2.5,-1.73 1.73,1.73, body extent -1.57,-1.57 1.58,1.58, height 1
SOT26A-6M [mm]
  rect 1.3x0.7 smd: 1(-1.2,0.95) 2(-1.2,0) 3(-1.2,-0.95) 4(1.2,-0.95) 5(1.2,0) 6(1.2,0.95)
  silkscreen extent -1.32,-1.55 0.15,1.97, body extent -0.9,-1.55 0.9,1.55
SW_7x7 [mm] "SW 7x7x12.5"
  rect 1.5x1.5 hole 1: 1(0,0)
  round 1.5 hole 1: 2(2.032,0) 3(4.064,0) 4(4.064,5.08) 5(2.032,5.08) 6(0,5.08)
  silkscreen extent -1.52,-1.02 5.59,6.1, body extent -1.52,-1.02 5.59,6.1, height 12.5
USB_C10418 [mm] "Micro USB 5C, TYPE B"
  rect 0.4x1.35 smd: 1(1.3,0) 2(0.65,0) 3(0,0) 4(-0.65,0) 5(-1.3,0)
  round 1.2 hole 0.7: 6(-2.425,-0.075) 8(2.425,-0.075)
  oval 1.2x1.6 hole 0.7 slot 1.1 at 90 deg: 7(-3.625,2.575) 9(3.625,2.575)
  silkscreen extent -4.32,-0.64 4.32,5.08, body extent -3.94,-0.64 3.94,4.44, height 3
XTAL_3215 [mm] "Cristal 3.2*1.5*0.9mm"
  rect 1.1x1.9 smd: 1(-1.25,0) 2(1.25,0)
  silkscreen extent -1.6,-0.75 1.6,0.75, body extent -1.6,-0.76 1.57,0.74, height 0.9
XTAL_3225 [mm] "Cristal 3.2*2.5*0.7"
  rect 1.4x1.2 smd paste-0.06 mask+0.05: 1(0,0) 2(2.2,0) 3(2.2,1.6) 4(0,1.6)
  silkscreen extent -0.5,-0.4 2.7,2.1, body extent -0.48,-0.41 2.69,2.08, height 0.7

## Part data
A200 A300: "Antenna single ended IIFA, 2450 MHz"
C100 C101 C102 C103 C104 C105 C106 C107 C108 C109 C110 C111 C112 C113 C114 C115 C116 C117 C118 C119 C200 C201 C202 C203 C204 C205 C206 C207 C208 C209 C210 C211 C212 C213 C214 C215 C216 C217 C218 C300 C301 C302 C303 C304 C305 C306 C307 C308 C309 C310 C311 C312 C313 C314 C315 C316 C317 C318 C319 C320 C400 C401 C402 C403 C404 C405 C406 C407: "Capacitor"
D1 D2 D3 D4 D5 D6 D400 D401: library part LED2, "Typical RED, GREEN, YELLOW, AMBER GaAs LED"
E100: library part Antenna, "Generic Antenna"
J1: "USB 2.0, Right Angle, SMT, B Type, Receptacle, 5 Position, Black"
P1 P2 P3: "Header, 3-Pin, Dual row"
P400: library part "Header 2", "Header, 2-Pin"
R1 R2 R3 R4 R5 R6 R7 R8 R9 R10 R11 R12 R100 R101 R200 R202 R300 R301 R302 R303 R305 R400 R401 R402 R403 R404 R405 R406 R407 R408 R409 R410 R411 R412 R413 R414 R415: "Resistor"
S1: "Switch"
U100 U200: "Single chip transceiver"
U300: "Single chip BLE"
U400: "USB Friendly 0.5 A Li+ Charger with Dynamic Power Management, 10.5 V OVP, 4.3 V, -40 to 85 degC, 16-pin QFN (RGT), Green (RoHS & no Sb/Br)"
U402: "Push Button On/Off Controller"
Y100 Y200 Y300: library part XTAL_4, "Crystal Oscillator"
Y101 Y201 Y301: library part XTAL, "Crystal Oscillator"

## Free pads (board coordinates)
  round 196.85 hole 110.24: 0(1120,1120) 1(2845,1120) 2(2845,2845) 3(1120,2845)

## Via types
v1: diameter 24, hole 12, Top Layer to Bottom Layer, 169 vias
v2: diameter 31.5, hole 11.81, Top Layer to Bottom Layer, 34 vias
v3: diameter 20, hole 10, Top Layer to Bottom Layer, 6 vias
v4: diameter 19.68, hole 7.87, Top Layer to Bottom Layer, tented top, 5 vias

## Nets (pads, with @x,y where several pads share a name; then routed paths per layer and width w, separated by ;. In a path a pad name is that pad's centre, name@x,y a point inside that pad or via, vN(x,y) a via of type N, cw(c..) or ccw(c..) an arc to the next point about the centre after c; other vN are vias at no path point)
AVDD_CC1110: C100.2 C101.2 C102.2 C103.2 C104.2 C105.2 C106.2 L100.1 U100.2 U100.10 U100.19 U100.22 U100.25 U100.26 U100.28 U100.29 | length 1827.3
  Top Layer w10: C106.2@1865,1639.53 1874.53,1649.06 U100.2@1936.5,1649.06 ; L100.1@1889.68,1695 1889.68,1729.68 v1(1890,1730) ; v1@1945,1471.5 U100.10@1974.68,1471.5 ; U100.29@2112.8,1708.5 2112.8,1747.52 2109.11,1751.2 2109.11,1753.2 2111,1755.09 2111,1755.31 2130,1755.31 ; U100.28@2132.48,1708.5 2132.48,1752.83 2130,1755.31 ; U100.19@2173.82,1511.26 2176.92,1508.16 2201.53,1508.16 C100.2@2210,1499.69 2210.31,1499.69 2210.31,1494.83 2221.02,1484.13 2224.81,1484.13 2240,1468.94 v1(2240,1455) ; U100.22@2173.82,1570.31 2209.96,1570.31 2218.12,1562.16 2247.84,1562.16 2260,1550 C103.2@2270.31,1550 ; U100.25@2173.82,1629.37 2204.37,1629.37 2215,1640 2240,1640 2245,1645 C104.2@2245,1665.31 2210,1665.31 2193.74,1649.06 U100.26@2173.82,1649.06 ; v1(2225,1760) 2208.94,1760 2207.69,1761.25 2147.31,1761.25 2146.06,1760 2130,1760 2130,1755.31 ; C104.2@2245.32,1665 v1(2300,1665) ; C103.2@2270.31,1544.69 C103.2@2270.31,1545 2275,1540.31 v1(2275,1520)
  Top Layer w20: C106.2@1874.53,1649.06 1889.68,1664.21 L100.1@1889.68,1695
  Signal Layer 1 w10: v1(1945,1475) 1900,1475 1900,1720 v1(1890,1730) 1920,1760 v1(2225,1760) 2270,1760 2300,1730 v1(2300,1665) 2300,1544.57 2285.68,1530.26 v1@2285.68,1520
AVDD_CC2510: C200.2 C201.2 C202.2 C203.2 C204.2 C205.2 C206.2 L200.1 U200.2 U200.10 U200.19 U200.22 U200.25 U200.26 U200.28 U200.29 | length 2316.5
  Top Layer w10: L200.1@2115.31,2460.32 2114.84,2459.84 C206.2@2114.84,2410 2150.32,2410 2155.32,2415 ; 2165.56,2345 2155.32,2355.24 2155.32,2415 ; 2166.38,2344.28 2190,2320.67 C203.2@2190,2320 2192.52,2317.48 2243.08,2317.48 2247.6,2322 2292.29,2322 U200.29@2296.81,2317.48 U200.28@2296.81,2337.17 ; C203.2@2190,2325 C203.2@2192.5,2322.5 ; C201.2@2305,2465 2375.94,2394.06 U200.25@2375.94,2378.5 ; C202.2@2310,2415 2310,2415.67 2285.67,2440 2220.32,2440 2207.32,2453 ; C202.2@2310,2420 2329.61,2420 2355.07,2394.54 2355.07,2379.69 U200.26@2356.26,2378.5 ; C201.2@2310,2470 C201.2@2310,2470.67 ; v1(2320.32,2500) 2310,2489.69 C201.2@2310,2470.67 ; U200.2@2356.26,2141.5 2356.26,2135.73 2344.03,2123.5 2343.81,2123.5 2290.32,2070 2290.32,2050 2300.32,2040 2465.39,2040 2476.92,2028.47 2545.92,2028.47 2575.32,2057.87 2575.32,2169.69 C205.2@2585.32,2179.69 ; U200.22@2435,2378.5 2435,2400.14 2443.16,2408.3 2443.16,2417.84 2460.63,2435.32 C200.2@2460.63,2465 2485.32,2489.69 v1(2485.32,2500) ; U200.19@2494.06,2378.5 2505.55,2390 2575,2390 2575,2365.32 v1(2580.32,2360) ; U200.10@2533.82,2179.69 C205.2@2585.32,2179.69 ; v1(2585.63,2204.69) C205.2@2585.63,2180 C205.2@2585.32,2179.69 ; 2155.32,2415 2193.32,2453 2207.32,2453 ; 2207.32,2453 2207.32,2482.53 2218.79,2494 2286.67,2494 C201.2@2310,2470.67
  Signal Layer 1 w10: v1(2320.32,2500) v1(2485.32,2500) 2545.32,2500 2580.32,2465 v1(2580.32,2360) 2585.63,2354.69 v1(2585.63,2204.69)
AVDD_CC2540: C302.2 C303.2 C304.2 C305.2 C306.2 C307.2 C308.2 C320.2 L300.1 U300.4 U300.10 U300.21 U300.24 U300.27 U300.28 U300.29 U300.31 U300.39 | length 2124.8
  Top Layer w10: v1@1509.69,2339.69 C302.2@1509.69,2305 1525,2305 1540,2290 1540,2275 1552,2263 1606.72,2263 1610.39,2259.33 U300.24@1626.65,2259.33 ; v1(1510,2130) C308.2@1469.53,2130 ; v1@1600,2425.32 C305.2@1630,2395.31 1626.65,2391.97 U300.21@1626.65,2318.39 ; U300.29@1626.65,2160.91 C303.2@1581.22,2160.91 ; U300.28@1626.65,2180.59 1600.91,2180.59 ; U300.27@1626.65,2200.28 1620.59,2200.28 1600.91,2180.59 ; U300.31@1666.42,2101.46 v1(1666.42,2066.1) C306.2@1645,2044.69 1555.31,2044.69 1533,2067 1505,2067 L300.1@1505,2074.68 1505,2094.53 C308.2@1469.53,2130 ; U300.39@1823.9,2101.46 1823.9,2095.69 1869.58,2050 C307.2@1870,2050 ; U300.10@1878.35,2318.39 1893.39,2318.39 v1(1920,2345) C320.2@1920,2389.41 ; U300.4@1878.62,2200 v1(1920,2200) ; C308.2@1469.53,2130 1499.21,2159.69 C304.2@1550,2159.69 C303.2@1580,2159.69 C303.2@1581.22,2160.91 ; C303.2@1581.22,2160.91 1600.91,2180.59
  Signal Layer 1 w10: v1(1510,2130) v1(1510,2340) v1(1600,2430) 1840,2430 v1@1925,2345 ; v1(1666.42,2066.1) v1(1848.9,2066.1) ; v1(1920,2200) v1(1920,2345)
CHARGING: D400.2 R401.1 U300.14 U400.9 | length 1790
  Top Layer w10: U400.9@1373.07,1400.47 1511.57,1400.47 1530,1418.9 R401.1@1530,1480.47 ; D400.2@1530,1391.34 v1(1575,1436.34) ; U300.14@1784.53,2358.15 1785,2358.62 1785,2371.06 1799,2385.06 1799,2404.94 1785,2418.94 v1(1785,2455)
  Bottom Layer w10: v1(1575,1436.34) 1575,1455.77 1456,1574.77 1456,1619.94 1470.06,1634 1505,1634 1530,1659 1530,1805 1400,1935 1400,2064.09 1401,2065.09 1401,2094.91 1400,2095.91 1400,2141.06 1434,2175.06 1434,2203.54 1661.46,2431 1751.6,2431 1757.6,2437 1758.51,2437 1776.51,2455 v1(1785,2455)
D_N: C300.1 R303.2 U300.3 | length 1179.3
  Top Layer w10: U300.3@1883.76,2181 1903.64,2181
  Top Layer w12: C300.1@1324.68,1910 1340.69,1894 1470,1894 1534,1830 1856.77,1830 2038.38,2011.62 2046,2019.23 2046,2150.77 2038.38,2158.38 2023.38,2173.38 2015.77,2181 1940,2181 1934,2175 1909.64,2175 1903.64,2181
  Top Layer w15: R303.2@1289.53,1910 C300.1@1324.68,1910
D_P: C301.1 R301.1 R302.2 U300.2 | length 1378.1
  Top Layer w10: U300.2@1883.35,2160.91 U300.2@1888.38,2160.91
  Top Layer w12: R302.2@1287.53,1860 1260,1887.53 1260,1957.48 1314.02,2011.5 1335.98,2011.5 1365,1982.48 1365,1935 1380,1920 1480.77,1920 1544.77,1856 1846,1856 2020,2030 2020,2140 2005,2155 1895.75,2155
  Top Layer w15: R302.2@1287.53,1860 R302.2@1289.53,1860 R301.1@1364.53,1860
DC_1110: P1.3 U100.16 | length 310.3
  Top Layer w10: P1.3@1955,1370 2010,1315 2076.03,1315 2096.53,1335.5 2096.53,1429.06 2092.8,1432.8 U100.16@2092.8,1471.5
DC_2510: P3.3 U200.16 | length 258.4
  Top Layer w10: U200.16@2533.82,2297.8 2717.52,2297.8 P3.3@2770.32,2245
DC_2540: P2.3 U300.34 | length 1266.2
  Top Layer w10: v1(1345,2060) v1(1450,1955) ; U300.34@1725.47,2101.46 1726.42,2100.51 1726.42,2028.43 1734,2020.85 1734,1991 v1(1770,1955)
  Bottom Layer w10: v1(1345,2060) 1298,2107 1298,2164.11 1300,2166.11 1300,2425 P2.3@1475,2600 ; v1(1450,1955) v1(1770,1955)
DD_1110: P1.4 U100.15 | length 346.4
  Top Layer w10: P1.4@1955,1270 1913.47,1311.53 1913.47,1387.2 1937.8,1411.53 2043,1411.53 2073.11,1441.64 U100.15@2073.11,1471.5
DD_2510: P3.4 U200.15 | length 386.2
  Top Layer w10: U200.15@2533.82,2278.11 2534.71,2279 2651.26,2279 2727.79,2202.47 2827.79,2202.47 P3.4@2870.32,2245
DD_2540: P2.4 U300.35 | length 1340.8
  Top Layer w10: v1(1340,2105) 1455,1990 v1(1475,1990) ; U300.35@1745.16,2101.46 1745.16,2087.19 1746.84,2085.51 1746.84,2037.7 1766,2018.54 1766,2010.06 1790,1986.06 v1(1790,1985)
  Bottom Layer w10: v1(1340,2105) 1325,2120 1325,2128.89 1349,2152.89 1349,2364 1515,2530 1515,2579.74 1516.53,2581.27 1516.53,2658.47 P2.4@1475,2700 ; v1(1475,1990) 1490,1975 1756.06,1975 1760.06,1979 1784,1979 v1(1790,1985)
DN: J1.2 R303.1 | length 51.1
  Top Layer w10: J1.2@1170,1900.59 R303.1@1221.06,1900.59
DP: J1.3 R302.1 | length 66.7
  Top Layer w10: J1.3@1170,1875 1215.47,1875 R302.1@1230.47,1860
EN_LDO: R414.1 U401.3 U402.7 | length 441.3
  Top Layer w10: R414.1@1435,1694.53 1445.63,1705.16 U402.7@1498.58,1705.16 ; R414.1@1440,1694.53 1410,1664.53 1410.28,1664.24 1410.28,1614.72 1415.31,1609.69 1479.69,1609.69 v1(1480,1610) ; v1(1595,1525) 1650.16,1525 U401.3@1652.76,1527.6
  Bottom Layer w10: v1(1480,1610) 1565,1525 v1(1595,1525)